# Altium PCB PCB1.PcbDoc
Units mil, origin at the board's own origin, x right, y up, seen from the top; angles counter-clockwise.
Board outline 2903 x 5015 mil, 2 copper layers (Top Layer, Bottom Layer); 48 components, 50 nets, 211 pads, 9 vias.
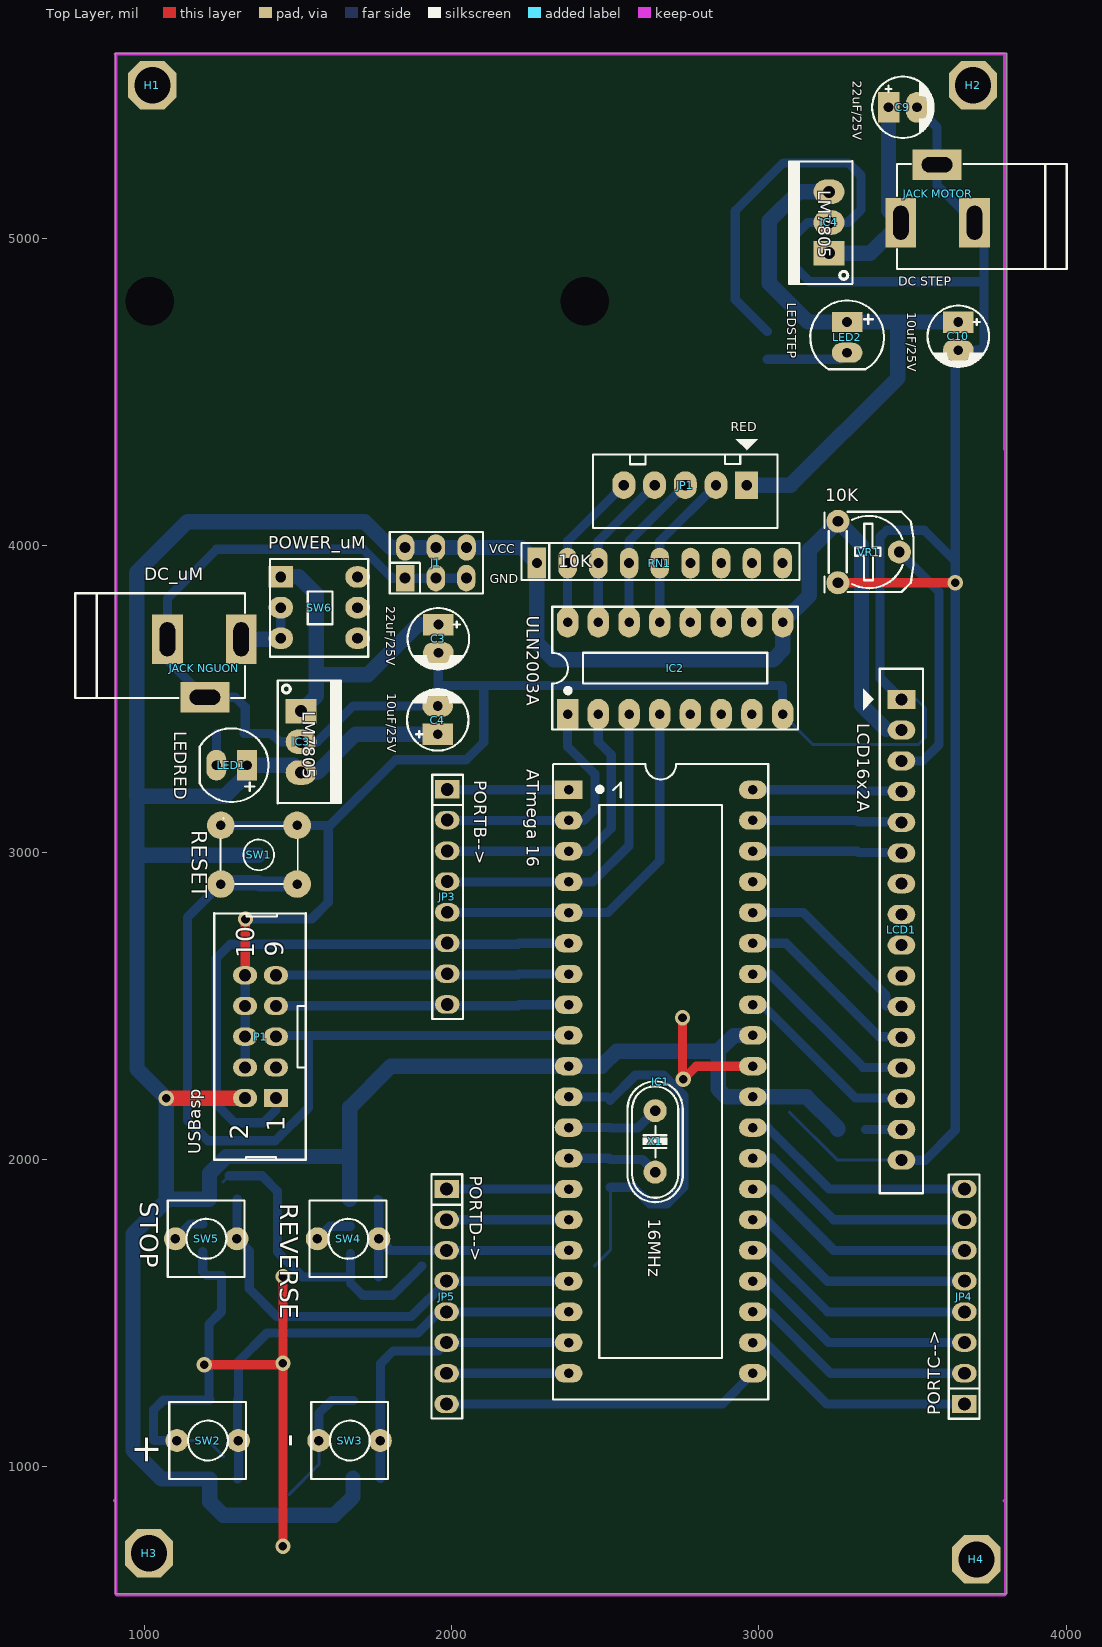
[diagram p0: Top Layer view]
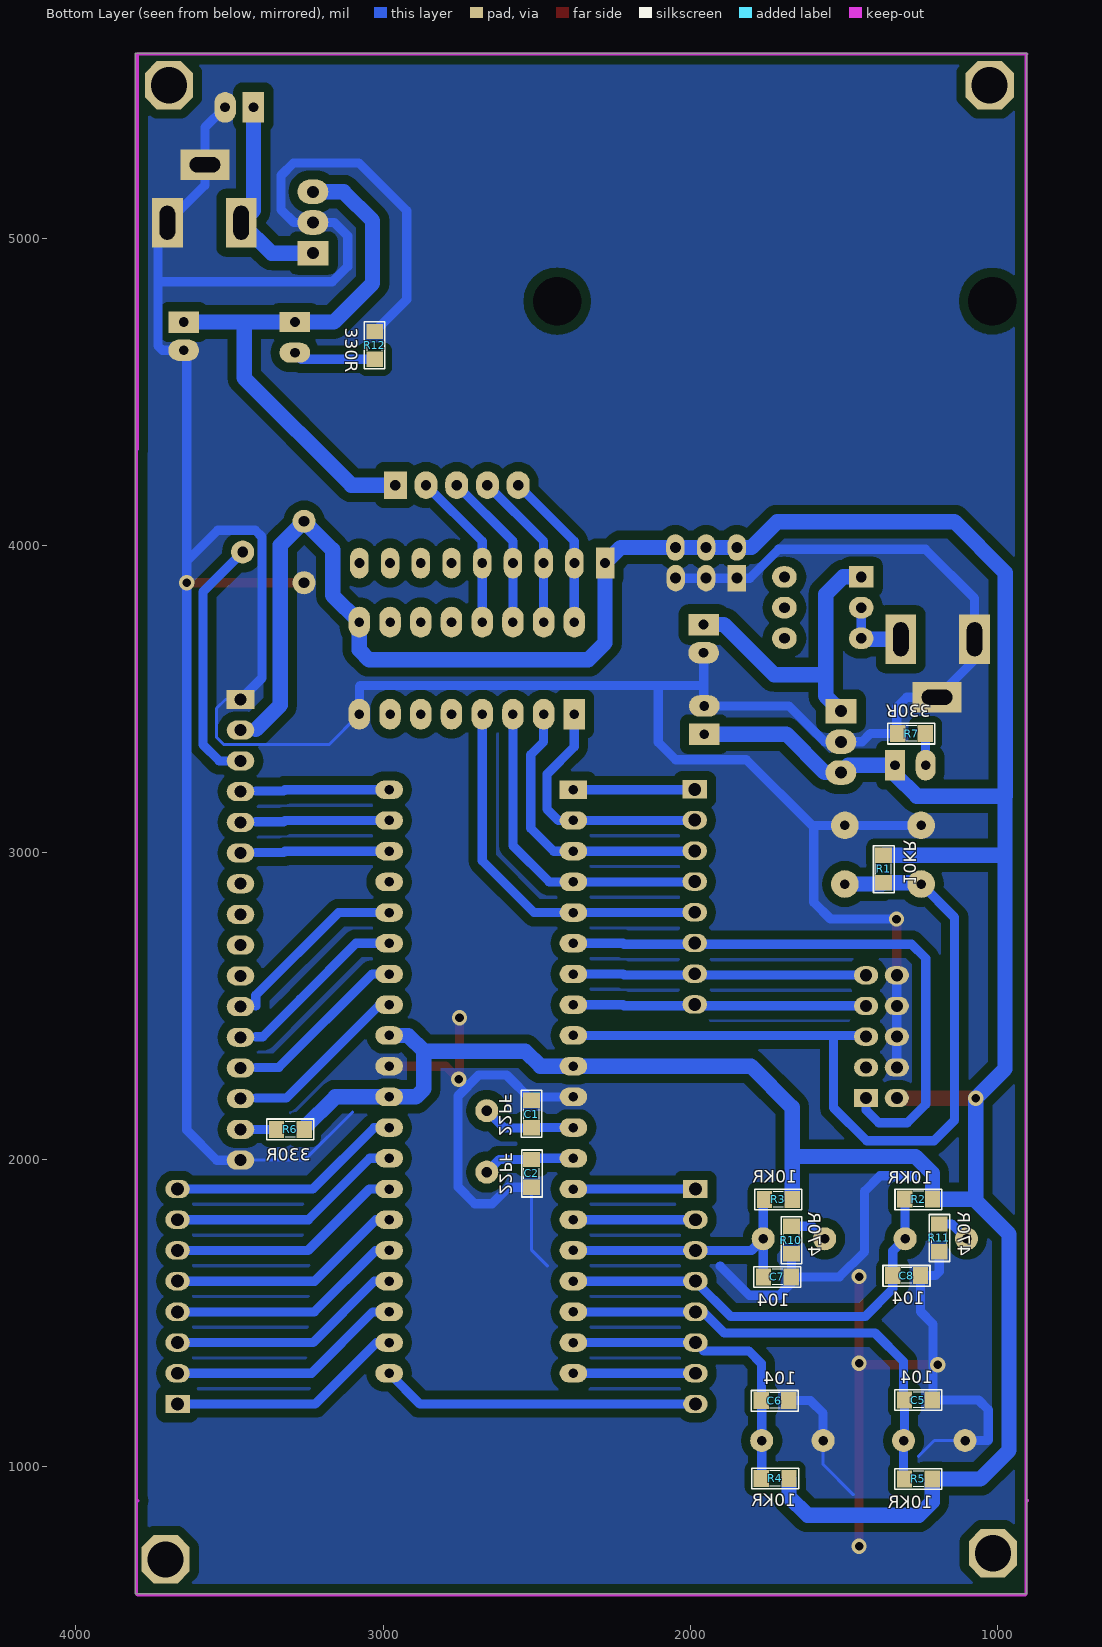
[diagram p1: Bottom Layer view, seen from below]
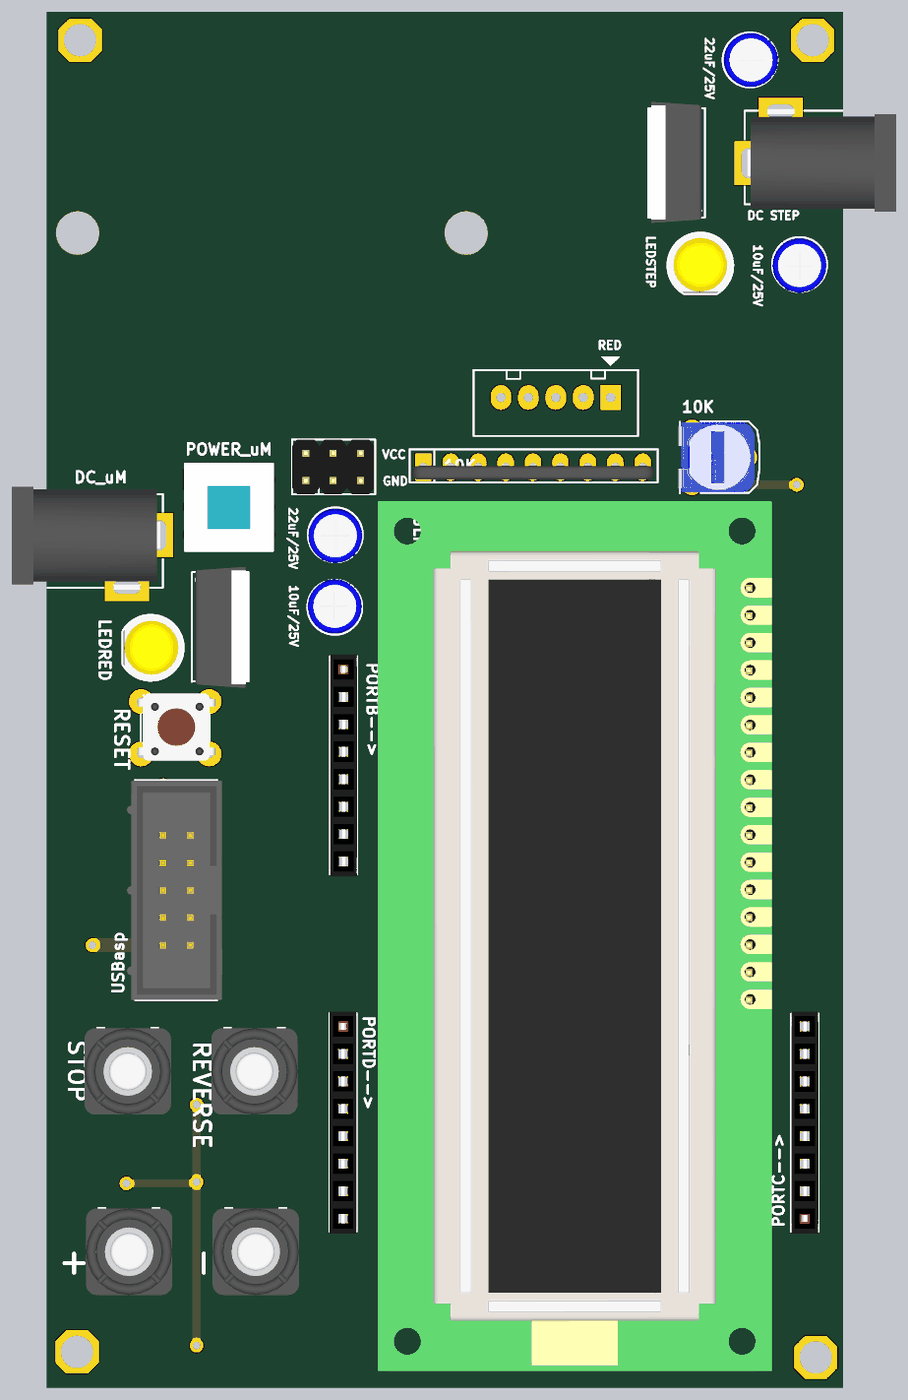
[diagram p2: 3D render of the assembled board from above, using the file's embedded part models]
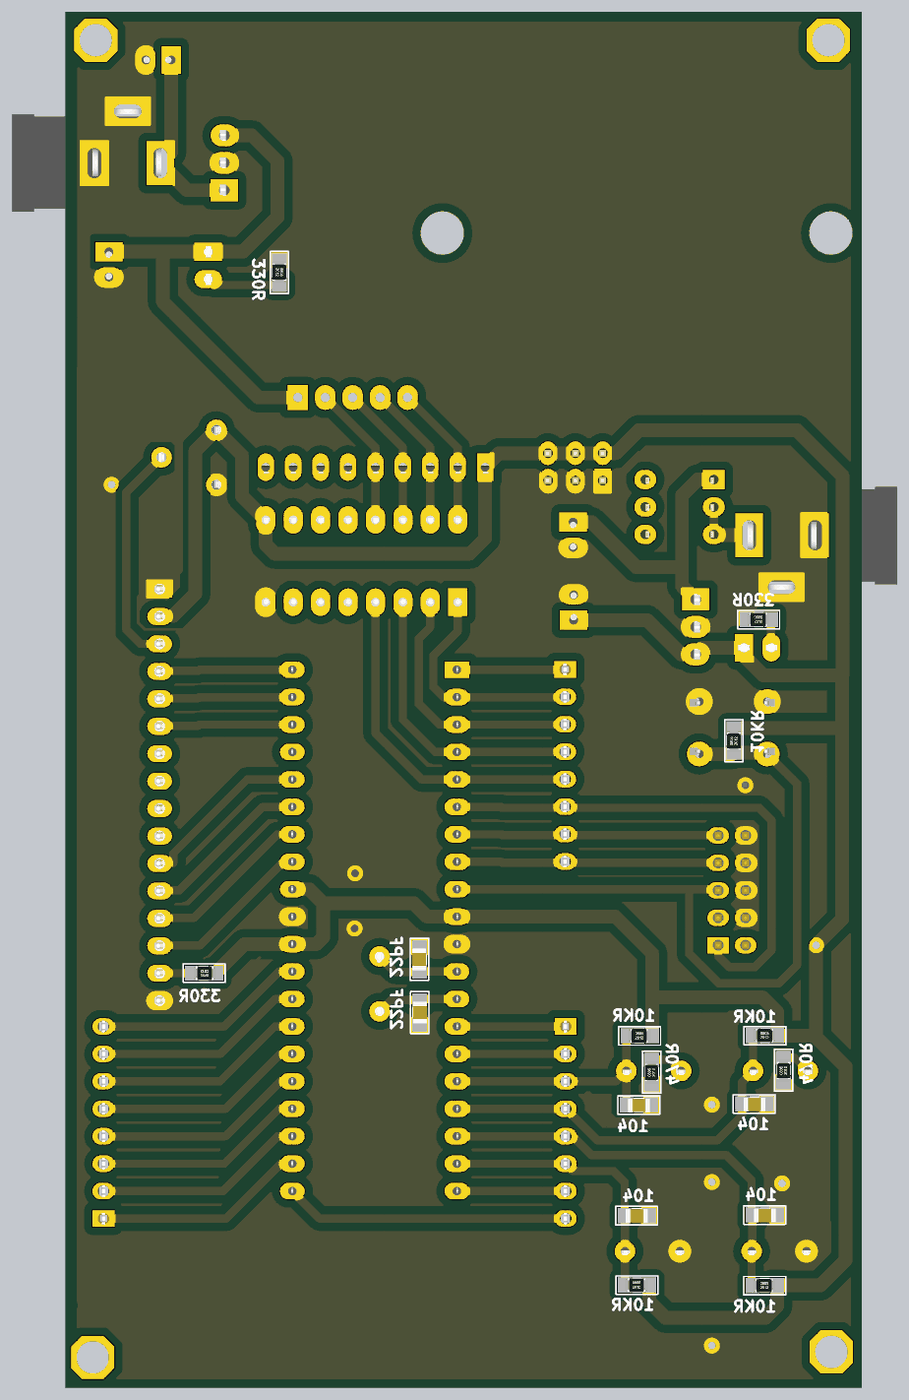
[diagram p3: 3D render of the assembled board from below, using the file's embedded part models]

## Layer stack, top to bottom
Top Solder: solder mask 0.4, Solder Resist, Dk 3.5
Top Layer: signal copper 1.4
Dielectric 1: dielectric 12.6, FR-4, Dk 4.8
Bottom Layer: signal copper 1.4
Bottom Solder: solder mask 0.4, Solder Resist, Dk 3.5

## Board outline
904,587 3807,587 3807,5602 904,5602

## Design rules (kind name [scope] priority, off if disabled: settings)
Clearance POLYGON [InPolygon] p1: gap=30 ignorepadtopadclearanceinfootprint=FALSE
Clearance [All] p2: gap=10 ignorepadtopadclearanceinfootprint=FALSE
ComponentClearance [All] p1: gap=0 collisioncheckmode=3 verticalgap=0 showdistances=FALSE
PolygonConnect [All] p1: connectstyle=Direct reliefconductorwidth=10 reliefentries=4 polygonreliefangle="90 Angle" airgapwidth=10
RoutingVias [All] p1: holewidth=28 width=50 viastyle="Through Hole" minholewidth=28 minwidth=50 maxholewidth=28 maxwidth=50
SolderMaskExpansion [All] p1: expansion=4
Width [All] p1: maxlimit=50 minlimit=10 preferedwidth=30
29 further rules are at their usual default settings.

## Components (designator, comment, footprint, x,y, rotation, side; value= is the part's Value field where it differs from the comment)
C1 "22PF" SM-0805 2516,2148 r270 bottom value=103
C2 "22PF" SM-0805 2516,1955 r90 bottom value=103
C3 "22uF/25V" CP1/2 1956,3742 r270 top value=10uF/50V
C4 "10uF/25V" CP1/2 1954,3384.87 r90 top value=10uF/50V
C5 "104" SM-0805 1257,1217 r180 bottom value=103
C6 "104" SM-0805 1724,1215 r180 bottom value=103
C7 "104" SM-0805 1716,1618 r180 bottom value=103
C8 "104" SM-0805 1295,1622 r180 bottom value=103
C9 "22uF/25V" CP1/2 3421.87,5426 r0 top value=10uF/50V
C10 "10uF/25V" CP1/2 3649,4727 r270 top value=10uF/50V
H1 "HOLE" HOLE 1025,5498 r0 top
H2 "HOLE" HOLE 3697,5498 r0 top
H3 "HOLE" HOLE 1014,718 r0 top
H4 "HOLE" HOLE 3708,698 r0 top
IC1 "ATmega 16" DIP40/W0.6 2380,3204 r270 top value="Atmega 16L"
IC2 "ULN2003A" DIP16/W0.3 2377,3450 r0 top
IC3 "LM7805" QTO-220 1509,3460 r270 top
IC4 "LM7805" QTO-220 3228,4951 r90 top
J1 "VCC" JP3x2 1948,3943 r0 top value="Connector 3x2"
"JACK MOTOR" "DC STEP" DC-IN 3702,5050 r180 top value="Jac DC"
"JACK NGUON" "DC_uM" DC-IN 1073.84,3694 r0 top value="Jac DC"
JP1 "RED" CON5 2960,4196 r180 top value="Connector 5"
JP3 "PORTB-->" JP_CAI_8 1985,3205 r270 top value=JP7
JP4 "PORTC-->" JP_CAI_8 3669,1203.99 r90 top value=JP7
JP5 "PORTD-->" JP_CAI_8 1983,1904 r270 top value=JP7
LCD1 "LCD16x2A" LCD16X2N 3464,3498 r270 top
LED1 "LEDRED" led5mm_yellow 1333,3284 r180 top value="LED 3 ly Single Colour"
LED2 "LEDSTEP" led5mm_yellow 3287,4727 r270 top value="LED 3 ly Single Colour"
P1 "USBasp" IDE_2X5 1427,2200 r90 top value="Header 5x2"
R1 "10KR" RES_0805 1366,2948 r90 bottom
R2 "10KR" RES_0805 1254,1867 r180 bottom
R3 "10KR" RES_0805 1711,1866 r180 bottom
R4 "10KR" RES_0805 1721,958 r180 bottom
R5 "10KR" RES_0805 1255,956 r180 bottom
R6 "330R" RES_0805 3304,2102 r0 bottom
R7 "330R" RES_0805 1277,3383 r180 bottom
R10 "470R" RES_0805 1666,1740 r90 bottom
R11 "470R" RES_0805 1185,1747 r90 bottom
R12 "330R" RES_0805 3031,4649 r270 bottom
RN1 "10K" RN8 2277,3942 r0 top value="Tro thanh 10K"
SW1 "RESET" SW4 1372,2993 r180 top value="Button chip 4 pin"
SW2 "+" SW2 1305,1085 r180 top value="SW chip 2 pin"
SW3 "-" SW2 1767,1085 r180 top value="SW chip 2 pin"
SW4 "REVERSE" SW2 1762,1742 r180 top value="SW chip 2 pin"
SW5 "STOP" SW2 1300,1742 r180 top value="SW chip 2 pin"
SW6 "POWER_uM" SW6 1443,3897 r0 top value=SW6
VR1 "10K" VR 3257,4078 r270 top value="VR 10K"
X1 "16MHz" XT2 2662,2059 r90 top value=4Mhz

## Footprints (in the part's own frame and the unit in brackets; to place one, negate y for a bottom-side part, rotate by r counter-clockwise, add the part's x,y. Pads: shape width x height; smd on the part's side, far side on the other; paste and mask are expansions set on the pad)
CON5 [mil] "CON5"
  rect 75x90 hole 34: 1(0,0)
  oval 75x90 hole 34: 2(100,0) 3(200,0) 4(300,0) 5(400,0)
  silkscreen extent -100,-150 500,140
CP1/2 [mil] "Tu hoa < 22uF/16>50V"
  rect 70x100 hole 32: 1(0,0)
  oval 70x100 hole 32: 2(92.13,0)
  silkscreen extent -53,-100 146,100, body extent -49,-99 149,99, height 287
DC-IN [mil] "Jac DC input"
  rect 100x160 hole 50 slot 110.24 at 90 deg: 1(240.16,0) 2(0,0)
  rect 160x100 hole 50 slot 100 at 0 deg: 3(122.05,-188.98)
  silkscreen extent -300,-191 253,150, body extent -299,-198 245,176, height 434
DIP16/W0.3 [mil] "16 PIN, W 300mil, Pin to pin 100mil"
  rect 70x100 hole 31: 1(0,0)
  oval 70x100 hole 31: 2(100,0) 3(200,0) 4(300,0) 5(400,0) 6(500,0) 7(600,0) 8(700,0) 9(700,300) 10(600,300) 11(500,300) 12(400,300) 13(300,300) 14(200,300) 15(100,300) 16(0,300)
  silkscreen extent -50,-50 750,350, body extent -52,-57 752,356, height 299
DIP40/W0.6 [mil] "40 PIN, W 600mil, Pin to pin 100mil"
  rect 60x90 hole 31: 1(0,0)
  oval 60x90 hole 31: 2(100,0) 3(200,0) 4(300,0) 5(400,0) 6(500,0) 7(600,0) 8(700,0) 9(800,0) 10(900,0) 11(1000,0) 12(1100,0) 13(1200,0) 14(1300,0) 15(1400,0) 16(1500,0) 17(1600,0) 18(1700,0) 19(1800,0) 20(1900,0) 21(1900,600) 22(1800,600) 23(1700,600) 24(1600,600) 25(1500,600) 26(1400,600) 27(1300,600) 28(1200,600) 29(1100,600) 30(1000,600) 31(900,600) 32(800,600) 33(700,600) 34(600,600) 35(500,600) 36(400,600) 37(300,600) 38(200,600) 39(100,600) 40(0,600)
  silkscreen extent -84,-51 1985,650, body extent -80,-47 1977,646, height 327
HOLE [mm]
  oct 4x4 hole 3: H(0,0)
IDE_2X5 [mm] "Header 10x2,20 pin, connecter"
  rect 1.5x2 hole 1: 1(0,0)
  oval 1.5x2 hole 1: 2(0,2.54) 3(2.54,0) 4(2.54,2.54) 5(5.08,0) 6(5.08,2.54) 7(7.62,0) 8(7.62,2.54) 9(10.16,0) 10(10.16,2.54)
  silkscreen extent -5.1,-2.47 15.29,5.11, body extent -5.07,-2.98 15.23,5.87, height 9.17
JP3x2 [mil] "Connector 3x2"
  rect 60x86 hole 36: 1(-100,-50)
  oval 60x86 hole 36: 2(0,-50) 3(99,-50) 4(-100,50) 5(0,50) 6(100,50)
  silkscreen extent -150,-100 153,100, body extent -150,-100 150,100, height 335
JP_CAI_8 [mil]
  rect 60x80 hole 42: 1(0,0)
  oval 60x80 hole 42: 2(100,0) 3(200,0) 4(300,0) 5(400,0) 6(500,0) 7(600,0) 8(700,0)
  silkscreen extent -48,-49 747,51, body extent -55,-48 755,50, height 335
LCD16X2N [mil] "LCD dipslay 16x2, 16 pin"
  rect 62x90 hole 39: 1(0,0)
  oval 62x90 hole 39: 2(100,0) 3(200,0) 4(300,0) 5(400,0) 6(500,0) 7(600,0) 8(700,0) 9(800,0) 10(900,0) 11(1000,0) 12(1100,0) 13(1200,0) 14(1300,0) 15(1400,0) 16(1500,0)
  silkscreen extent -100,-125 1608,70, body extent -320,-1353 2850,84, height 764
led5mm_yellow [mil]
  rect 65x100 hole 32: 1(0,0)
  oval 65x100 hole 32: 2(100,0)
  silkscreen extent -70,-120 154,120, body extent -67,-118 146,119, height 347
QTO-220 [mil] "TO-220 - 1-2-3"
  rect 80x100 hole 39: 1(0,0)
  oval 80x100 hole 39: 2(100,0) 3(200,0)
  silkscreen extent -100,-76 300,130, body extent -119,-64 322,121, height 755
RES_0805 [mil]
  rect 50x55 smd: 1(-47,4) 2(43,4)
  silkscreen extent -79,-30 74,37, body extent -43,-21 35,29, height 18
RN8 [mil] "R SIP8, 9 Pin"
  rect 60x100 hole 32: 1(0,0)
  oval 60x100 hole 32: 2(100,0) 3(200,0) 4(300,0) 5(400,0) 6(500,0) 7(600,0) 8(700,0) 9(800,0)
  silkscreen extent -50,-55 855,65, body extent -43,-44 843,5, height 259
SM-0805 [mil] "Compoment SMD 80x50mil"
  rect 50x55 smd: 1(-45,0) 2(45,0)
  silkscreen extent -77,-34 76,33, body extent -40,-27 40,23, height 24
SW2 [mil] "SW button 2pin, 250x 250 mil"
  round 75 hole 31: 1(0,0) 2(200,0)
  silkscreen extent -25,-125 225,125, body extent -56,-161 258,159, height 157
SW4 [mil] "SW button 4pin, 250 x250 mil"
  round 90 hole 31: 1(-124,-95) 2(124,96) 3(124,-95) 4(-124,96)
  silkscreen extent -126,-119 125,96, body extent -160,-124 152,120, height 276
SW6 [mil] "SW DTDP - 6Pin 260x300x300 mil"
  rect 80x70 hole 35: 1(0,0)
  oval 80x70 hole 35: 2(0,-100) 3(0,-200) 4(250,-200) 5(250,-100) 6(250,0)
  silkscreen extent -35,-260 285,58, body extent -33,-259 281,55, height 532
VR [mil] "Resistor Variable"
  round 75 hole 35: 1(0,0) 2(100,200) 3(200,0)
  silkscreen extent -31,-44 231,246, body extent -28,-51 228,227, height 293
XT2 [mil] "Footpin for Crystal 2 pin"
  round 75 hole 34: 1(-100,0) 2(100,0)
  silkscreen extent -198,-90 195,90, body extent -233,-93 213,90, height 138

## Part data
C1 C2 C5 C6 C7 C8: library part CM, "Cap SMD"
C3 C4 C9 C10: library part CP1, "Cap P  0,1uF < 22uF , 16 - 50V", Description 1="10 => 220uF/6,3V/10V - 10uF => 100uF/16V", Description 2="0,1uF => 33uF/50V - 10uF => 22uF/63V", Description 3="0,47uF => 10uF/100V"
IC1: library part Atmega16L, "8-Bit AVR Microcontroller with 16K Bytes of In-System Programmable Flash Memory"
IC2: "High-Voltage, High-Current Darlington Array", LatestRevisionNote="Stylized 3D Model Added.", Publisher="Altium Limited"
IC3 IC4: library part LM78xx, "On ap +, from + 5 to + 24VDC", =LM7808
J1: library part JP3x2, "Connector 3x2"
"JACK MOTOR" "JACK NGUON": library part DCIN, "Jac DC input"
JP1: library part Con5, "Connector 5"
JP3 JP4 JP5: library part JP8, "JP8 PIN"
LCD1: library part LCD16x2, "LCD dipslay 16 char, 2 line"
LED1 LED2: library part LED, "LED Single colour Green and Red"
P1: library part "IDE 5x2", "Header 5x2"
R1 R2 R3 R4 R5 R6 R7 R10 R11 R12: library part RES_0805, "res_dan"
RN1: library part RN8, "Resistor 8 (Thanh)"
SW1: library part SW4, "Switch button 4 pin"
SW2 SW3 SW4 SW5: library part SW2, "Switch button 2 pin"
SW6: library part SW6A, "SW-DTDP - 6 Pin"
VR1: library part VR, "Var Resistor"
X1: library part XT2, "Crystal For all Crystal 2pin."

## Free pads (board coordinates)
  round 60 hole 157.48: 3(1016,4795) 4(2433,4795)

## Via types
v1: diameter 50, hole 28, Top Layer to Bottom Layer, 9 vias

## Nets (pads, with @x,y where several pads share a name; then routed paths per layer and width w, separated by ;. In a path a pad name is that pad's centre, name@x,y a point inside that pad or via, vN(x,y) a via of type N, cw(c..) or ccw(c..) an arc to the next point about the centre after c; other vN are vias at no path point)
5V: C4.1 IC1.10 IC1.30 IC1.32 IC2.9 IC3.3 J1.4 J1.5 J1.6 LCD1.2 LED1.1 P1.2 R1.2 R2.2 R3.2 R4.2 R5.2 R6.1 RN1.1 VR1.1 | length 12375.7
  Top Layer w50: v1(1070,2200) P1.2
  Bottom Layer w50: R1.2 981,2991 975,2985 ; R3.2 1668,2009 ; R4.2 1678,902 1618,842 1255,842 1212,885 R5.2 1055,960 962,1053 962,1757 1076,1871 ; C4.1 1686.87,3384.87 1562,3260 IC3.3 1485,3284 LED1.1 1333,3254 1262,3183 976,3183 ; IC1.32 2918,2404 2867,2353 ; R6.1 3257,2102 3155,2204 IC1.30 2893,2204 2867,2230 2867,2353 ; 3414,3400 3334,3480 3334,4001 VR1.1 3164,3985 3164,3837 IC2.9 3077,3659 3045,3627 2332,3627 2277,3682 RN1.1 2226,3993 J1.6 J1.5 J1.4 1800,3993 1716,4077 1140,4077 974,3911 974,3183 975,3183 ; 975,2985 975,3183 ; 975,2985 975,2295 v1(1070,2200) 1070,1877 1076,1871 ; 975,3183 976,3183 ; 975,3183 975,3184 976,3183 ; 1076,1871 R2.2 1211,1955 1266,2010 1667,2010 1668,2009 ; 1668,2009 1668,2170 1802,2304 IC1.10 2488,2304 2537,2353 2867,2353
D4: IC1.36 LCD1.11 | length 580.4
  Bottom Layer w30: IC1.36 3145,2804 3414,2535 3414,2500
D5: IC1.35 LCD1.12 | length 560.3
  Bottom Layer w30: IC1.35 3088,2704 3270,2522 3270,2521.43 3391.43,2400 3414,2400
D6: IC1.34 LCD1.13 | length 559.9
  Bottom Layer w30: IC1.34 3035,2604 3339,2300 3414,2300
D7: IC1.33 LCD1.14 | length 559.9
  Bottom Layer w30: IC1.33 3011,2504 3315,2200 3414,2200
DAO: C7.1 IC1.16 JP5.3 R3.1 SW4.1 | length 887.8
  Bottom Layer w30: R3.1 1762,1866 SW4.1 ; C7.1 1762,1619 SW4.1 ; IC1.16 JP5.3 1800,1704 SW4.1
DUNG: C8.1 IC1.17 JP5.4 R2.1 SW5.1 | length 1433.9
  Bottom Layer w30: R2.1 1300,1870 SW5.1 1340,1702 C8.1 1340,1579 1430,1489 1868,1489 JP5.4 IC1.17
EN: IC1.38 LCD1.6 | length 435.7
  Bottom Layer w30: IC1.38 3319,3004 3323,3000 3414,3000
GIAM: C6.1 IC1.19 JP5.6 R4.1 SW3.1 | length 1015.8
  Bottom Layer w30: R4.1 1767,963 SW3.1 1767,1213 C6.1 1768,1216 1768,1336 1809,1377 1956,1377 JP5.6 IC1.19
GND: "JACK MOTOR.2" "JACK MOTOR.3" "JACK NGUON.2" "JACK NGUON.3" C1.1 C2.1 C3.2 C4.2 C5.2 C6.2 C7.2 C8.2 C9.2 C10.2 IC1.11 IC1.31 IC2.8 IC3.2 IC4.2 J1.1 J1.2 J1.3 LCD1.1 LCD1.16 P1.4 P1.6 P1.8 P1.10 R7.1 R10.1 R11.1 R12.1 SW1.1 SW1.3 SW2.2 SW3.2 VR1.3 | length 19523
  Top Layer w30: v1(1194,1332) 1445,1332 v1(1450,1337) ; P1.10 1327,2782 v1(1328,2783) ; v1(1450,741) v1(1450,1337) ; v1(1450,1619) v1(1450,1337) ; v1(2751,2462) 2751,2263 v1(2753,2261) 2796,2304 IC1.31 ; VR1.3 v1(3639,3878)
  Bottom Layer w10: SW2.2 1205,1085 1257,1033 ; C8.2@1247.5,1624.5 C8.2 ; 1255,1927 1275,1947 ; 1469,909 1567,1007 SW3.2 ; C7.2@1671,1597 C7.2 ; 2464,1653 2516,1705 C2.1 ; IC2.8 3176,3351 3518,3351 3542,3375 3542,3469 3513,3498 LCD1.1 ; 3099,2155 3256,1998 LCD1.16
  Bottom Layer w30: SW2.2 1031,1085 1029,1087 1029,1185 1061,1217 C5.2 1209,1220 1209,1464 1250,1505 C8.2 1202,1622 1189,1635 R11.1 ; SW1.3 SW1.1 1603,3088 ; 1275,1947 1382,1947 1432,1897 1432,1700 1514,1618 C7.2 1670,1619 R10.1 ; P1.4 P1.6 P1.8 P1.10 ; v1(1328,2783) 1543,2783 1597.5,2837.5 1597.5,3082.5 1603,3088 ; SW3.2 1567,1174 1608,1215 C6.2 ; C7.2@1671,1597 1710,1558 1807,1558 1902,1653 ; C3.2 1956,3548 ; J1.3 J1.2 J1.1 1806,3893 1712,3987 1234,3987 1073.84,3826.84 1073.84,3694 1073.84,3627.07 1195.89,3505.02 1294.98,3505.02 1327,3473 1327,3390 R7.1 1413,3387 1440,3360 IC3.2 1562,3360 1679,3477 C4.2 1956,3479 1956,3548 ; IC1.11 2505,2204 C1.1 2598,2275 2688,2275 2756,2207 2756,1911 2701,1856 2645,1856 2591,1910 C2.1 ; R12.1 2923,4800 2923,5089 3079,5245 3291,5245 3332,5204 3332,5093 3290,5051 IC4.2 3159,5051 3115,5007 3115,4908 3165,4858 3733,4858 ; IC2.8 3077,3540 3074,3543 2104,3543 ; LCD1.16 3541,1998 3639,2096 v1(3639,3878) 3639,4624.87 C10.2 3717.87,4634.87 3733,4650 3733,4858 ; LCD1.1 3394,3568 3394,4027 3416,4049 3538,4049 3633,3954 ; C9.2 3579.95,5360.05 3579.95,5238.98 3579.95,5172.05 3702,5050 3733,5019 3733,4858 ; 1603,3088 1817,3302 2047,3302 2104,3359 2104,3543 ; 1956,3548 1961,3543 2104,3543
"IN A1": IC1.2 IC2.1 JP3.2 | length 842.6
  Bottom Layer w30: JP3.2 1986,3104 IC1.2 2429,3104 2466,3141 2466,3255 2377,3344 IC2.1
"IN A2": IC1.3 IC2.2 JP3.3 | length 953.9
  Bottom Layer w30: JP3.3 1986,3004 IC1.3 2444,3004 2519,3079 2519,3318 2477,3360 IC2.2
"IN B1": IC1.4 IC2.3 JP3.4 | length 1069.3
  Bottom Layer w30: JP3.4 1986,2904 IC1.4 2459,2904 2577,3022 IC2.3
"IN B2": IC1.5 IC2.4 JP3.5 | length 1241.8
  Bottom Layer w30: JP3.5@1983,2806 1985,2804 IC1.5 2508,2804 2677,2973 IC2.4
MISO: IC1.7 JP3.7 P1.9 | length 954.7
  Bottom Layer w30: P1.9 1428,2601 2215,2601 2218,2604 IC1.7
MOSI: IC1.6 JP3.6 P1.1 | length 1917.1
  Bottom Layer w30: P1.1 1427,2161 1386,2120 1293,2120 1233,2180 1233,2655 1279,2701 2215,2701 2218,2704 IC1.6
NetC1_2: C1.2 IC1.12 X1.2 | length 305.6
  Bottom Layer w30: IC1.12 2515,2104 C1.2 2606,2103 X1.2
NetC2_2: C2.2 IC1.13 X1.1 | length 300.6
  Bottom Layer w30: IC1.13 2512,2004 C2.2 2621,2000 X1.1
NetC3_1: C3.1 IC3.1 SW6.1 | length 1005.3
  Bottom Layer w50: SW6.1 1502,3897 1559,3840 1559,3578 ; IC3.1 1559,3510 1559,3578 ; C3.1 1890,3742 1726,3578 1559,3578
NetC9_1: "JACK MOTOR.1" C9.1 IC4.1 | length 667.4
  Bottom Layer w50: IC4.1 3362.84,4951 3461.84,5050 3421.87,5089.97 C9.1
NetIC1_1: IC1.1 JP3.1 | length 395.4
  Bottom Layer w30: JP3.1 1986,3204 IC1.1
NetIC1_20: IC1.20 JP5.7 | length 397
  Bottom Layer w30: JP5.7 IC1.20
NetIC1_21: IC1.21 JP5.8 | length 1038.4
  Bottom Layer w30: JP5.8 2880,1204 IC1.21
NetIC1_22: IC1.22 JP4.1 | length 771.8
  Bottom Layer w30: IC1.22 3021,1404 3221.01,1203.99 JP4.1
NetIC1_23: IC1.23 JP4.2 | length 771.8
  Bottom Layer w30: IC1.23 3033,1504 3233.01,1303.99 JP4.2
NetIC1_24: IC1.24 JP4.3 | length 771.8
  Bottom Layer w30: IC1.24 3028,1604 3228.01,1403.99 JP4.3
NetIC1_25: IC1.25 JP4.4 | length 771.8
  Bottom Layer w30: IC1.25 3024,1704 3224.01,1503.99 JP4.4
NetIC1_26: IC1.26 JP4.5 | length 771.8
  Bottom Layer w30: IC1.26 3023,1804 3223.01,1603.99 JP4.5
NetIC1_27: IC1.27 JP4.6 | length 771.8
  Bottom Layer w30: IC1.27 3044,1904 3244.01,1703.99 JP4.6
NetIC1_28: IC1.28 JP4.7 | length 771.8
  Bottom Layer w30: IC1.28 3043,2004 3243.01,1803.99 JP4.7
NetIC1_29: IC1.29 JP4.8 | length 773.3
  Bottom Layer w30: IC1.29@2981,2105 IC1.29 3029,2104 3229.01,1903.99 JP4.8
NetIC2_13: IC2.13 JP1.2 RN1.5 | length 481.2
  Bottom Layer w30: IC2.13 2677,3900 RN1.5@2678,3901 ; RN1.5 2677,4013 JP1.2
NetIC2_14: IC2.14 JP1.3 RN1.4 | length 481.2
  Bottom Layer w30: IC2.14 2577,3900 RN1.4@2578,3901 ; RN1.4 2577,4013 JP1.3
NetIC2_15: IC2.15 JP1.4 RN1.3 | length 481.2
  Bottom Layer w30: IC2.15 2477,3900 RN1.3@2478,3901 ; RN1.3 2477,4013 JP1.4
NetIC2_16: IC2.16 JP1.5 RN1.2 | length 483.4
  Bottom Layer w30: IC2.16 2377,3900 RN1.2@2378,3901 ; RN1.2@2379.22,3942 RN1.2 2377,4013 JP1.5
"NetJACK NGUON_1": "JACK NGUON.1" SW6.2 SW6.3 | length 230.2
  Bottom Layer w30: SW6.3 SW6.2
  Bottom Layer w50: 1314,3694 1440,3694 SW6.3
NetLCD1_3: LCD1.3 VR1.2 | length 824.4
  Bottom Layer w30: VR1.2 3586,3849 3586,3351 3533,3298 LCD1.3
NetLCD1_15: LCD1.15 R6.2 | length 117
  Bottom Layer w30: R6.2 LCD1.15
NetLED1_2: LED1.2 R7.2 | length 103.4
  Bottom Layer w30: LED1.2 1234,3285 R7.2
NetLED2_2: LED2.2 R12.2 | length 268.7
  Bottom Layer w30: R12.2 3266,4606 LED2.2
NetR10_2: R10.2 SW4.2 | length 125
  Bottom Layer w30: SW4.2 1603,1783 R10.2
NetR11_2: R11.2 SW5.2 | length 108.9
  Bottom Layer w30: SW5.2 1148,1790 R11.2
RS: IC1.40 LCD1.4 | length 435.7
  Bottom Layer w30: IC1.40 3319,3204 3323,3200 3414,3200
RST: IC1.9 P1.5 R1.1 SW1.2 SW1.4 | length 2721.6
  Bottom Layer w30: SW1.2 1139,2788 1139,2128 1206,2061 1425,2061 1533,2169 1533,2404 ; P1.5 1431,2404 1533,2404 ; IC1.9 1533,2404
  Bottom Layer w50: SW1.2 1252,2901 R1.1 1374,2897 SW1.4
RW: IC1.39 LCD1.5 | length 435.7
  Bottom Layer w30: IC1.39 3319,3104 3323,3100 3414,3100
RX: IC1.14 JP5.1 | length 397
  Bottom Layer w30: JP5.1 IC1.14
SCK: IC1.8 JP3.8 P1.7 | length 954.7
  Bottom Layer w30: P1.7 1428,2501 2215,2501 2218,2504 IC1.8
TANG: C5.1 IC1.18 JP5.5 R5.1 SW2.1 | length 1527.8
  Bottom Layer w30: R5.1 1305,963 SW2.1 1302,1088 C5.1 1305,1220 1305,1342 1398,1435 1889,1435 1958,1504 JP5.5 IC1.18
TX: IC1.15 JP5.2 | length 397
  Bottom Layer w30: JP5.2 IC1.15
V_MOTOR: C10.1 IC4.3 JP1.1 LED2.1 | length 1922.7
  Bottom Layer w50: JP1.1 3103,4196 3452,4545 3452,4727 ; IC4.3 3128,5151 3034,5057 3034,4853 3160,4727 LED2.1 3452,4727 ; C10.1 3452,4727
pads on no net: H1.H H2.H H3.H H4.H IC1.37 IC2.5 IC2.6 IC2.7 IC2.10 IC2.11 IC2.12 LCD1.7 LCD1.8 LCD1.9 LCD1.10 P1.3 RN1.6 RN1.7 RN1.8 RN1.9 SW6.4 SW6.5 SW6.6

## Polygon pours and split planes (outlines as drawn)
GND on Bottom Layer "Bot-GND" (solid, pour order 6): 906,5598 3799,5598 3799,584 3800,583 908,583 908,5596

## Keep-outs
Keep-Out Layer:
  lines w10: 901,889 907,895 ; 3798,889 3802,885 ; 907,895 907,584 908,583 3800,583 3802,585 3802,885 ; 907,895 907,4314 907,5597 904,5600 3797,5600 3799,5598 3799,4314 3802,4311 3802,885

## Silkscreen, mask and mechanical layers (free items; w line width, h text height)
Top Overlay:
  text "GND" at 2124,3877 h30

## Text inside footprints (layer, text, board x,y; h text height)
P1: Top Overlay "10" at 1356,2656 h60 r90; Top Overlay "9" at 1451,2661 h60 r90; Top Overlay "2" at 1337,2065 h60 r90; Top Overlay "1" at 1456.53,2090.75 h60 r90